# Altium PCB ECG_NEMO_final_V1B_main_stack1_fix.PcbDoc
Units mm, origin at the board's own origin, x right, y up, seen from the top; angles counter-clockwise.
Board outline 86.69 x 55.98 mm, 4 copper layers (Top Layer, Signal Layer 1 2.5V, Signal Layer 2, Bottom Layer), stack 0.778 mm thick; 47 components, 36 nets, 184 pads, 15 vias.
Unrouted connection lines stored in the file: 55.
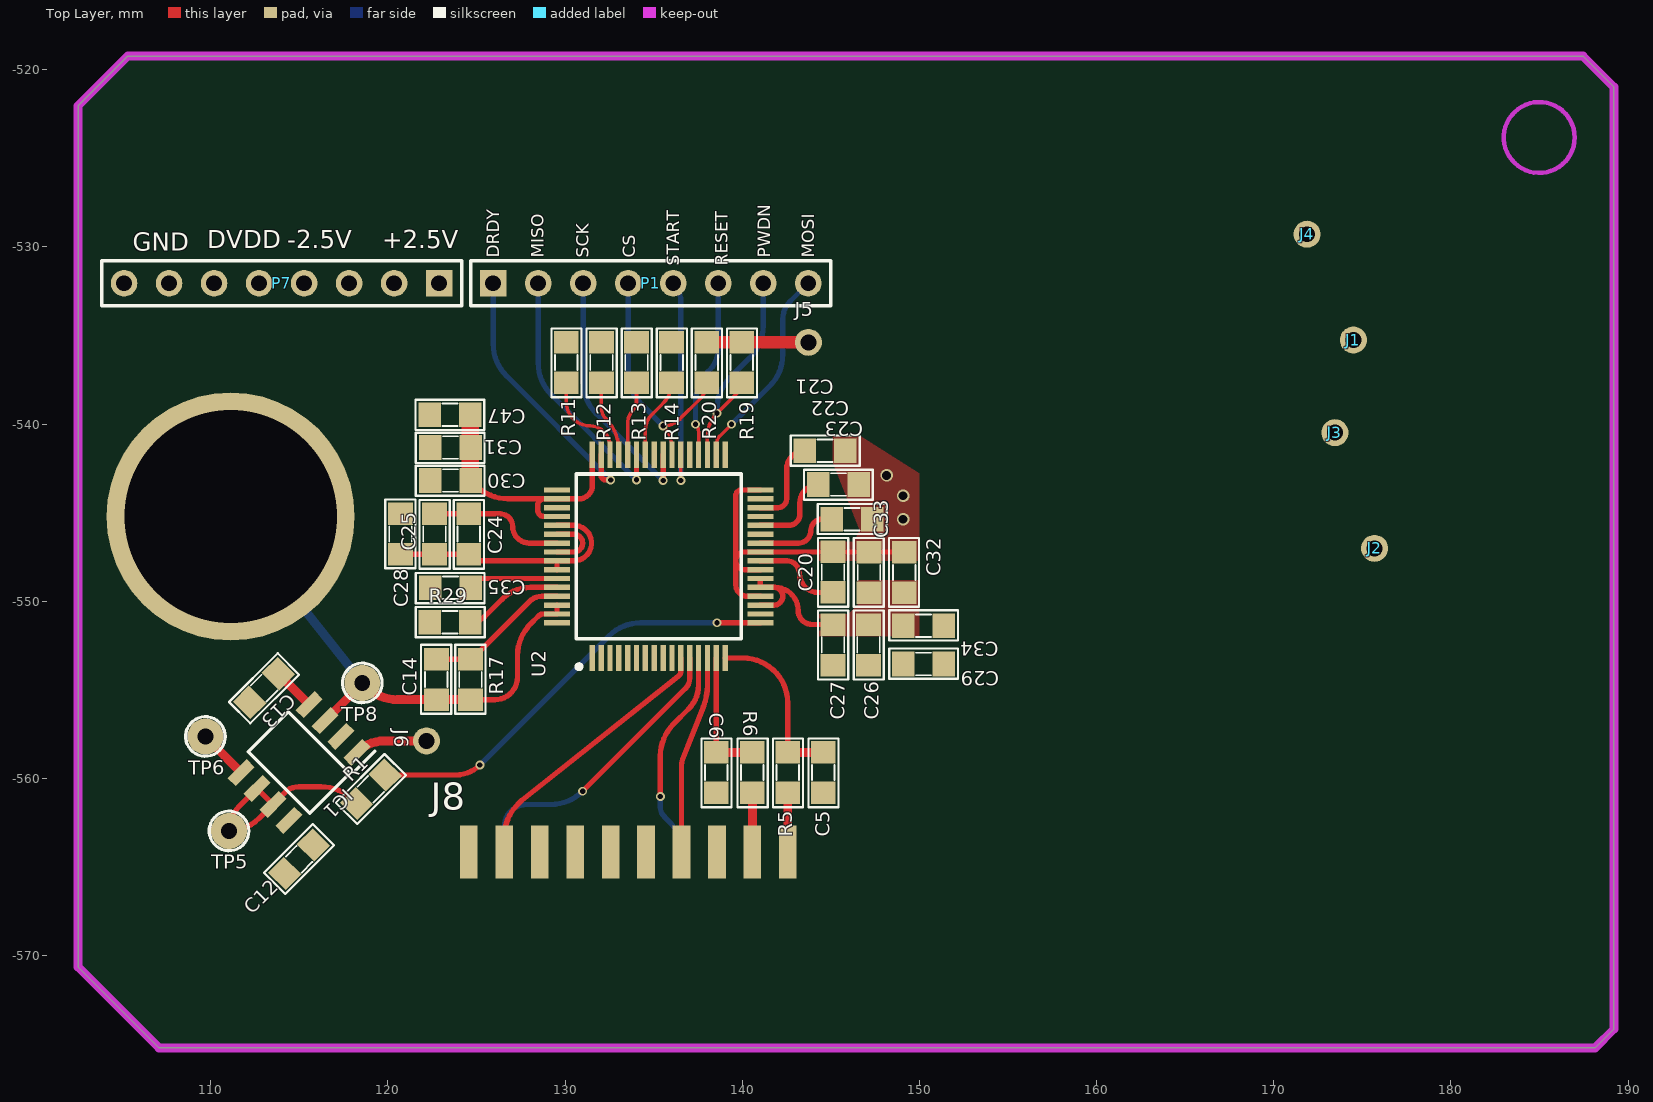
[diagram p0: Top Layer view]
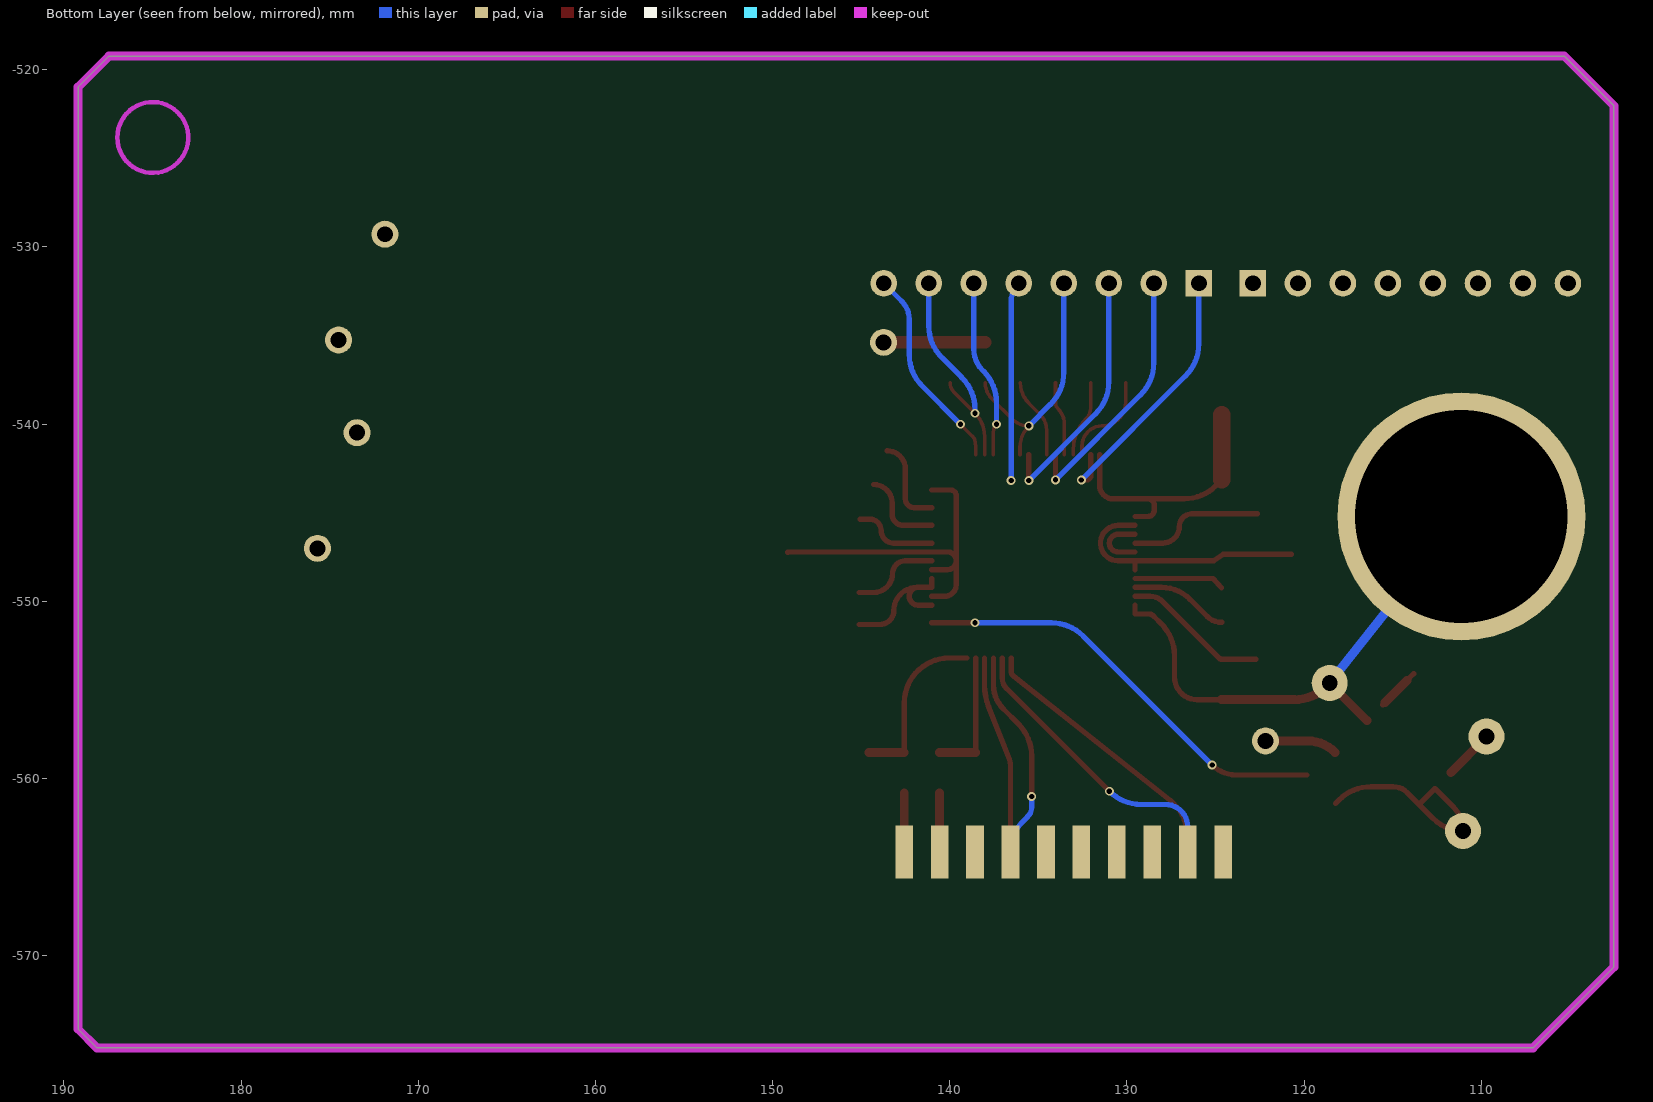
[diagram p1: Bottom Layer view, seen from below]
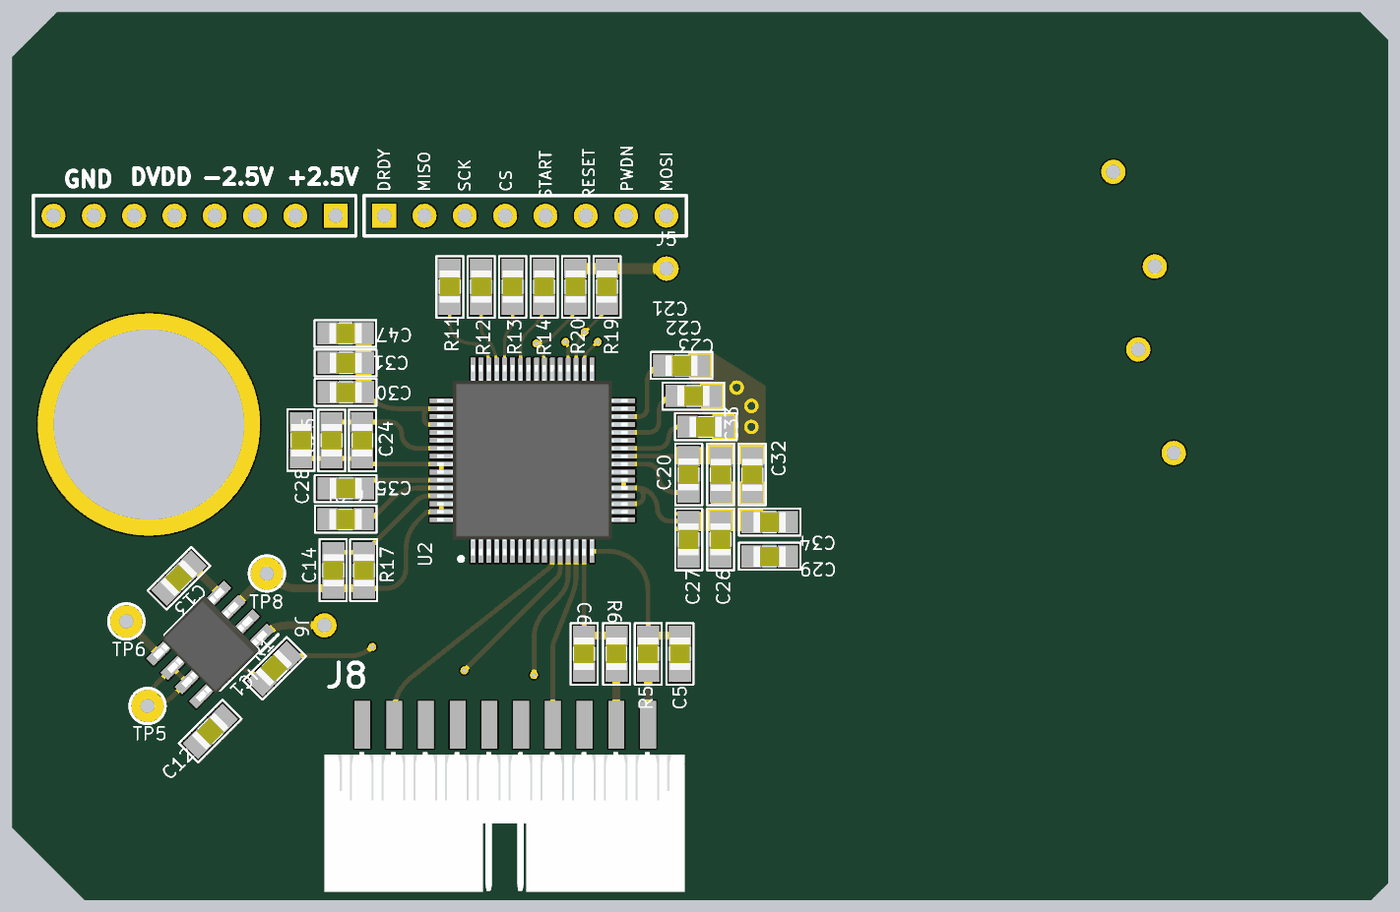
[diagram p2: 3D render of the assembled board from above, using the file's embedded part models]

## Layer stack, top to bottom
Top Solder: solder mask 0.0102, Solder Resist, Dk 3.5
Top Layer: signal copper 0.0356
Dielectric 1: core 0.254, FR-4, Dk 4.2
Signal Layer 1 2.5V: signal copper 0.036
Dielectric 3: prepreg 0.127, Dk 4.2
Signal Layer 2: signal copper 0.036
Dielectric 2: core 0.254, Dk 4.2
Bottom Layer: signal copper 0.0356
Solder Side: solder mask 0.0102, Solder Resist, Dk 3.5

## Board outline
102.514,-570.636 107.086,-575.208 188.138,-575.208 189.205,-574.142 189.205,-520.979 187.452,-519.227 105.32,-519.227 102.514,-522.033

## Design rules (kind name [scope] priority, off if disabled: settings)
Clearance Clearance_5mils [TouchesRoom('Driver') and OnTopLayer] p1: gap=0.127 ignorepadtopadclearanceinfootprint=TRUE
Clearance Clearance_5.7mils [TouchesRoom('FETs')] p2: gap=0.145 ignorepadtopadclearanceinfootprint=FALSE
Clearance Clearance_keepout [OnLayer('Keep-Out Layer')] p3: gap=0.711 ignorepadtopadclearanceinfootprint=FALSE
Clearance [All] p4: gap=0.2 ignorepadtopadclearanceinfootprint=FALSE
ComponentClearance [All] p1: gap=0.3 collisioncheckmode=3 verticalgap=0.3 showdistances=TRUE
HoleSize [All] p1: absolutevalues=TRUE maxlimit=10 minlimit=0.025 maxpercent=80.000 minpercent=20.000
HoleToHoleClearance [All] p1: gap=0.241 allowstackedmicrovias=TRUE
MinimumSolderMaskSliver [All] p1 off: minsoldermaskwidth=0.254
PlaneConnect [All] p1: planeconnectstyle=Direct reliefexpansion=0.508 reliefentries=4 reliefconductorwidth=0.254 reliefairgap=0.254
PolygonConnect [All] p1: connectstyle=Direct reliefconductorwidth=0.254 reliefentries=4 polygonreliefangle="90 Angle" airgapwidth=0.254
RoutingVias [All] p1: holewidth=0.3 width=0.5 viastyle="Through Hole" minholewidth=0.178 minwidth=0.351 maxholewidth=0.508 maxwidth=0.762
ShortCircuit [All] p1: allowed=TRUE
SilkToSilkClearance [All] p1 off: silktosilkclearance=0.254
SilkToSolderMaskClearance [IsPad] p1 off: minsilkscreentomaskgap=0.254 clearancetoexposedcopper=TRUE
SolderMaskExpansion [All] p1: expansion=0.102 istentingtop=FALSE
UnRoutedNet [All] p1: checkbadconnections=TRUE
UnpouredPolygon [All] p1 off:
Width [All] p1: maxlimit=3 minlimit=0.2 preferedwidth=0.3
20 further rules are at their usual default settings.

## Components (designator, comment, footprint, x,y, rotation, side; value= is the part's Value field where it differs from the comment)
C5 "4.7nF" SM-0805 144.574,-559.671 r90 top value=103
C6 "4.7nF" SM-0805 138.538,-559.671 r90 top value=103
C12 "0.1uF" SM-0805 114.987,-564.565 r225 top value=103
C13 "0.1uF" SM-0805 113.012,-554.897 r45 top value=103
C14 "1nF" SM-0805 122.74,-554.412 r270 top value=103
C20 "10uF" SM-0805 145.12,-548.36 r90 top value=103
C21 "1uF" SM-0805 144.676,-541.507 r180 top value=103
C22 "100uF" SM-0805 145.438,-543.412 r0 top value=103
C23 "1uF" SM-0805 146.2,-545.368 r180 top value=103
C24 "1uF" SM-0805 124.562,-546.21 r90 top value=103
C25 "0.1uF" SM-0805 122.631,-546.21 r90 top value=103
C26 "1uF" SM-0805 147.133,-552.456 r90 top value=103
C27 "0.1uF" SM-0805 145.12,-552.456 r90 top value=103
C28 "1uF" SM-0805 120.719,-546.21 r270 top value=103
C29 "0.1uF" SM-0805 150.225,-553.536 r180 top value=103
C30 "1uF" SM-0805 123.527,-543.183 r0 top value=103
C31 "0.1uF" SM-0805 123.527,-541.326 r0 top value=103
C32 "1uF" SM-0805 149.145,-548.385 r270 top value=103
C33 "0.1uF" SM-0805 147.158,-548.385 r270 top value=103
C34 "1uF" SM-0805 150.225,-551.377 r180 top value=103
C35 "0.1uF" SM-0805 123.527,-549.243 r0 top value=103
C47 "10uF" SM-0805 123.513,-539.467 r0 top value=103
IC1 "OPA2376AIDRG4" SOIC127P600X175-8N 114.987,-559.099 r225 top
J1 "Jump 1" PCBComponent_1 174.498,-535.254 r0 top
J2 "Jump 1" PCBComponent_1 175.692,-547.014 r0 top
J3 "Jump 1" PCBComponent_1 173.457,-540.487 r0 top
J4 "Jump 1" PCBComponent_1 171.882,-529.285 r0 top
J5 "Jump 1" PCBComponent_1 143.736,-535.386 r90 top
J6 "Jump 1" PCBComponent_1 122.182,-557.882 r270 top
J8 "DF11-20DP-2DSA_01_" "20P 2.5MM" 142.574,-564.146 r180 top
P1 "BOT Header 1" HDR1X8 125.948,-532.052 r0 top
P7 "TOP Header 3" HDR1X8 122.892,-532.052 r180 top
R1 "0" SM-0805 119.043,-560.611 r225 top value="R1/4W - 1K"
R5 "4.99k" SM-0805 142.574,-559.671 r90 top value="R1/4W - 1K"
R6 "4.99k" SM-0805 140.574,-559.671 r90 top value="R1/4W - 1K"
R11 "10k" SM-0805 130.073,-536.529 r90 top value="R1/4W - 1K"
R12 "10k" SM-0805 132.055,-536.529 r90 top value="R1/4W - 1K"
R13 "10k" SM-0805 134.036,-536.529 r90 top value="R1/4W - 1K"
R14 "10k" SM-0805 136.017,-536.529 r90 top value="R1/4W - 1K"
R17 "499k, 01%" SM-0805 124.67,-554.412 r270 top value="R1/4W - 1K"
R19 "10k" SM-0805 139.979,-536.529 r90 top value="R1/4W - 1K"
R20 "10k" SM-0805 137.998,-536.529 r90 top value="R1/4W - 1K"
R29 "1k" SM-0805 123.513,-551.192 r180 top value="R1/4W - 1K"
TP5 "TP" TP1 111.036,-562.962 r180 top value="Test Point"
TP6 "TP" TP1 109.704,-557.631 r180 top value="Test Point"
TP8 "TP" TP1 118.558,-554.61 r180 top value="Test Point"
U2 "Part Number: ADS1299IPAGR" QFP50P1200X1200X120-64N 135.288,-547.467 r90 top value=Value

## Footprints (in the part's own frame and the unit in brackets; to place one, negate y for a bottom-side part, rotate by r counter-clockwise, add the part's x,y. Pads: shape width x height; smd on the part's side, far side on the other; paste and mask are expansions set on the pad)
"20P 2.5MM" [mm]
  rect 1x3 smd: 1(0,0) 3(2,0) 5(4,0) 7(6,0) 9(8,0) 11(10,0) 13(12,0) 15(14,0) 17(16,0) 19(18,0)
  rect 1x3 smd far side: 2(0,0) 4(2,0) 6(4,0) 8(6,0) 10(8,0) 12(10,0) 14(12,0) 16(14,0) 18(16,0) 20(18,0)
  body extent -2.31,1.73 20.39,10.53, height 3.51
HDR1X8 [mm] "Connector; Header; 8 Position"
  rect 1.5x1.5 hole 0.9: 1(0,0)
  round 1.5 hole 0.9: 2(2.54,0) 3(5.08,0) 4(7.62,0) 5(10.16,0) 6(12.7,0) 7(15.24,0) 8(17.78,0)
  silkscreen extent -1.27,-1.27 19.05,1.27
PCBComponent_1 [mil]
  round 60 hole 35.43: 1(0,0)
QFP50P1200X1200X120-64N [mm]
  rect 1.475x0.3 smd: 1(-5.738,3.75) 2(-5.738,3.25) 3(-5.738,2.75) 4(-5.738,2.25) 5(-5.738,1.75) 6(-5.738,1.25) 7(-5.738,0.75) 8(-5.738,0.25) 9(-5.738,-0.25) 10(-5.738,-0.75) 11(-5.738,-1.25) 12(-5.738,-1.75) 13(-5.738,-2.25) 14(-5.738,-2.75) 15(-5.738,-3.25) 16(-5.738,-3.75) 33(5.738,-3.75) 34(5.738,-3.25) 35(5.738,-2.75) 36(5.738,-2.25) 37(5.738,-1.75) 38(5.738,-1.25) 39(5.738,-0.75) 40(5.738,-0.25) 41(5.738,0.25) 42(5.738,0.75) 43(5.738,1.25) 44(5.738,1.75) 45(5.738,2.25) 46(5.738,2.75) 47(5.738,3.25) 48(5.738,3.75)
  rect 0.3x1.475 smd: 17(-3.75,-5.738) 18(-3.25,-5.738) 19(-2.75,-5.738) 20(-2.25,-5.738) 21(-1.75,-5.738) 22(-1.25,-5.738) 23(-0.75,-5.738) 24(-0.25,-5.738) 25(0.25,-5.738) 26(0.75,-5.738) 27(1.25,-5.738) 28(1.75,-5.738) 29(2.25,-5.738) 30(2.75,-5.738) 31(3.25,-5.738) 32(3.75,-5.738) 49(3.75,5.738) 50(3.25,5.738) 51(2.75,5.738) 52(2.25,5.738) 53(1.75,5.738) 54(1.25,5.738) 55(0.75,5.738) 56(0.25,5.738) 57(-0.25,5.738) 58(-0.75,5.738) 59(-1.25,5.738) 60(-1.75,5.738) 61(-2.25,5.738) 62(-2.75,5.738) 63(-3.25,5.738) 64(-3.75,5.738)
  silkscreen extent -6.35,-4.65 4.65,4.65, body extent -6,-6 6,6, height 1.2
SM-0805 [mil]
  rect 50x55 smd: 1(-45,0) 2(45,0)
  silkscreen extent -77,-34 76,33, body extent -40,-25 40,25, height 24
SOIC127P600X175-8N [mm]
  rect 1.528x0.65 smd: 1(-2.711,1.905) 2(-2.711,0.635) 3(-2.711,-0.635) 4(-2.711,-1.905) 5(2.711,-1.905) 6(2.711,-0.635) 7(2.711,0.635) 8(2.711,1.905)
  silkscreen extent -3.47,-2.45 1.6,2.58, body extent -3.01,-2.45 3.01,2.45, height 1.63
TP1 [mil]
  round 80 hole 35: 1(0,0)
  silkscreen extent -44,-44 44,44

## Part data
C5 C6 C12 C13 C14 C20 C21 C22 C23 C24 C25 C26 C27 C28 C29 C30 C31 C32 C33 C34 C35 C47: library part CM, "Cap SMD"
IC1: "Integrated Circuit", Manufacturer_Name="Texas Instruments", Mouser Part Number=595-OPA2376AIDRG4, Arrow Part Number=OPA2376AIDRG4, Arrow Price/Stock=https://www.arrow.com/en/products/opa2376aidrg4/texas-instruments, Datasheet Link=https://datasheet.datasheetarchive.com/originals/distributors/SFDatasheet-6/sf-000133686.pdf, Height=1.75mm, Manufacturer_Part_Number=OPA2376AIDRG4, Mouser Price/Stock=https://www.mouser.co.uk/ProductDetail/Texas-Instruments/OPA2376AIDRG4?qs=IUbkBnfnSQIcJ9njy8NzUg%3D%3D
J1 J2 J3 J4 J5 J6: library part jump1
J8: "Connector", Manufacturer_Name=Hirose, Manufacturer_Part_Number=DF11-20DP-2DSA(01), Mouser Part Number=798-DF11-20DP-2DSA01, Datasheet Link=https://www.hirose.com/en/product/document?clcode=CL0543-0525-3-01&productname=DF11-20DP-2DSA(01)&series=DF11&documenttype=2DDrawing&lang=en&documentid=0000995343, Height=7.1mm, Mouser Price/Stock=https://www.mouser.co.uk/ProductDetail/Hirose-Connector/DF11-20DP-2DSA01?qs=Ux3WWAnHpjAvHkbqZ9K7Yg%3D%3D
P1 P7: library part "Header 8", "Header, 8-Pin", LatestRevisionDate=17-Jul-2002, LatestRevisionNote="Re-released for DXP Platform.", Publisher="Altium Limited"
R1 R5 R6 R11 R12 R13 R14 R17 R19 R20 R29: library part R, "Resistor 1/4W"
TP5 TP6 TP8: library part TP1, "Test Point"
U2: library part ADS1299IPAGR, "No Description Available", Built_By=EMA_UL_Team, Copyright="Copyright (C) 2018 Accelerated Designs. All rights reserved", Manufacturer_Part_Number=ADS1299IPAGR, RefDes=RefDes, Type=DEV, Vendor="Texas Instruments"

## Free pads (board coordinates)
  round 14 hole 12: 1(111.125,-545.217)

## Via types
v1: diameter 0.5, hole 0.3, Top Layer to Bottom Layer, 12 vias
v2: diameter 0.7, hole 0.5, Top Layer to Signal Layer 1 2.5V, 3 vias

## Nets (pads, with @x,y where several pads share a name; then routed paths per layer and width w, separated by ;. In a path a pad name is that pad's centre, name@x,y a point inside that pad or via, vN(x,y) a via of type N, cw(c..) or ccw(c..) an arc to the next point about the centre after c; other vN are vias at no path point)
+2.5V: C12.1 C26.2 C27.2 C32.2 C33.2 C34.2 C35.2 IC1.8 J1.1 J2.1 J8.5 J8.6 J8.19 J8.20 P7.1 P7.2 U2.19 U2.21 U2.22 U2.54 U2.56 U2.59 | length 16.7
  Top Layer w0.3: C35.2 125.155,-548.717 U2.59 ; U2.56 130.495,-547.217 ccw(c130.495,-546.717) 130.995,-546.717 ccw(c130.495,-546.717) 130.495,-546.217 U2.54 ; U2.19 141.791,-550.217 ccw(c141.791,-549.717) 142.291,-549.717 ccw(c141.791,-549.717) 141.791,-549.217 ; U2.22 U2.21 141.791,-549.217 ; C27.2 143.95,-551.313 cw(c143.95,-550.526) 143.162,-550.526 ccw(c141.854,-550.526) 141.854,-549.217 141.791,-549.217
-2.5V: C13.2 C20.2 C21.1 C22.2 C23.1 C24.1 C25.1 C26.1 C27.1 C28.2 C29.2 C32.1 C33.1 IC1.4 J3.1 J4.1 J8.11 J8.12 J8.13 J8.14 P7.3 P7.4 U2.20 U2.23 U2.25 U2.32 U2.53 U2.57 U2.58 | length 36.8
  Top Layer w0.3: C13.2 C13.2@114.204,-554.481 ; IC1.4@115.434,-555.711 IC1.4 ; C28.2 C25.1 C24.1 125.11,-547.717 U2.57 ; U2.58 U2.57 ; U2.53 130.137,-545.717 130.495,-545.717 cw(c130.495,-546.717) 130.495,-547.717 U2.57 ; U2.20 140.288,-549.717 cw(c140.288,-549.067) 139.638,-549.067 139.638,-547.717 ; U2.23 140.138,-548.217 cw(c140.138,-547.717) 139.638,-547.717 ; U2.32 139.968,-543.717 ccw(c139.968,-544.047) 139.638,-544.047 139.638,-547.717 ; C32.1 ccw(c149.12,-547.242) 149.12,-547.217 C20.2 U2.25 140.138,-547.217 ccw(c140.138,-547.717) 139.638,-547.717
  Top Layer w0.5: C13.2@114.204,-554.481 IC1.4@115.434,-555.711
  other v2: 149.082,-545.368 149.082,-544.047 148.155,-542.892
BIAS: C14.2 IC1.3 pad.1 R17.2 TP8.1 U2.62 U2.63 | length 30.1
  Top Layer w0.3: R17.2 126.04,-555.555 ccw(c126.04,-554.277) 127.318,-554.277 127.318,-553.069 cw(c129.858,-553.069) 128.062,-551.273 128.488,-550.847 cw(c128.802,-551.161) 128.802,-550.717 U2.63 U2.62
  Top Layer w0.5: IC1.3 118.544,-554.645 ccw(c118.51,-554.61) TP8.1 118.759,-554.811 ccw(c120.555,-553.015) 120.555,-555.555 C14.2 R17.2
  Bottom Layer w0.5: pad.1 TP8.1
CS: P1.4 R20.1 U2.39 | length 14.2
  Top Layer w0.2: U2.39 136.038,-541.309 ccw(c134.331,-541.309) v1(135.538,-540.102) ccw(c135.538,-538.75) 136.494,-539.706 137.623,-538.577 ccw(c136.719,-537.672) R20.1
  Bottom Layer w0.3: P1.4 133.568,-537.08 ccw(c136.108,-537.08) 134.312,-538.876 v1(135.538,-540.102)
DRDY: P1.1 U2.47 | length 15.6
  Top Layer w0.3: U2.47 132.038,-542.892 ccw(c132.294,-542.892) 132.294,-543.148 132.574,-543.148 v1(132.574,-543.154)
  Bottom Layer w0.3: P1.1 125.948,-535.475 ccw(c128.488,-535.475) 126.692,-537.271 v1(132.574,-543.154)
DVDD: C30.2 C31.2 C47.2 J5.1 P7.5 P7.6 R19.2 R20.2 U2.48 U2.50 U2.52 | length 20.9
  Top Layer w0.3: C30.2@124.656,-543.148 124.981,-543.473 ccw(c126.777,-541.677) 126.777,-544.217 U2.50 130.794,-544.217 ccw(c130.794,-543.473) 131.538,-543.473 U2.48 ; 128.812,-544.217 ccw(c128.812,-544.567) 128.462,-544.567 128.462,-544.867 ccw(c128.812,-544.867) 128.799,-545.217 128.801,-545.217 ccw(c128.811,-544.917) 128.812,-545.217 128.964,-545.217 U2.52
  Top Layer w0.7: R20.2 R19.2 J5.1
  Top Layer w1: C30.2@124.656,-543.148 C47.2
Elec_1: J8.17 U2.11 | length 15.6
  Top Layer w0.3: J8.17 126.574,-563.277 cw(c129.114,-563.277) 127.318,-561.481 127.582,-561.217 136.388,-554.229 ccw(c136.188,-553.942) 136.538,-553.942 U2.11
Elec_2: J8.7 U2.14 | length 11.2
  Top Layer w0.3: J8.7 136.574,-559.24 cw(c137.425,-559.24) 136.633,-558.929 ; 136.633,-558.928 137.806,-555.958 ccw(c134.705,-554.736) 138.038,-554.736 U2.14
Elec_3: C5.2 R5.2 U2.16 | length 9.8
  Top Layer w0.3: U2.16 140.034,-553.205 cw(c140.034,-555.745) 142.574,-555.745 R5.2
  Top Layer w0.5: R5.2 C5.2
Elec_4: C6.2 R6.2 U2.15 | length 7.4
  Top Layer w0.3: C6.2 U2.15
  Top Layer w0.5: C6.2 R6.2
Elec_5: J8.18 U2.12 | length 16.7
  Top Layer w0.3: v1(130.995,-560.723) 136.812,-554.906 ccw(c136.268,-554.362) 137.038,-554.362 U2.12
  Bottom Layer w0.3: J8.18 126.574,-562.731 cw(c127.838,-562.731) 127.838,-561.467 129.199,-561.467 ccw(c129.199,-558.927) v1(130.995,-560.723)
Elec_6: J8.8 U2.13 | length 12
  Top Layer w0.3: v1(135.382,-561.017) 135.382,-558.722 cw(c137.922,-558.722) 136.126,-556.926 136.986,-556.066 ccw(c135.653,-554.733) 137.538,-554.734 137.538,-553.792 U2.13
  Bottom Layer w0.3: v1(135.382,-561.017) 135.382,-561.628 ccw(c136.111,-561.628) 135.595,-562.143 135.85,-562.398 cw(c134.101,-564.146) J8.8
GND: C5.1 C6.1 C12.2 C13.1 C28.1 C29.1 C30.1 C31.1 C34.1 C35.1 C47.1 J8.9 J8.10 J8.15 J8.16 P7.7 P7.8 R11.2 R12.2 R13.2 R14.2 R29.2 U2.31 U2.33 U2.41 U2.49 U2.51
MISO: P1.2 U2.43 | length 14.7
  Top Layer w0.3: v1(134.038,-543.148) U2.43
  Bottom Layer w0.3: P1.2 128.488,-536.546 ccw(c131.028,-536.546) 129.232,-538.342 v1(134.038,-543.148)
MOSI: P1.8 U2.34 | length 11.6
  Top Layer w0.2: U2.34 138.538,-541.331 138.574,-541.007 138.575,-541 cw(c138.984,-541.015) 138.705,-540.715 138.706,-540.714 ccw(c138.566,-540.571) 138.734,-540.68 v1(139.401,-540.012)
  Bottom Layer w0.3: v1(139.401,-540.012) 141.547,-537.867 ccw(c139.751,-536.071) 142.291,-536.071 142.291,-534.086 cw(c143.731,-534.086) 142.713,-533.067 P1.8
NetC14_1: C14.1 R17.1 U2.61 | length 8.2
  Top Layer w0.3: C14.1 R17.1 ccw(c124.67,-553.119) 124.776,-553.225 127.986,-550.015 ; 127.986,-550.015 cw(c128.706,-550.735) 128.706,-549.717 U2.61
NetC20_1: C20.1 U2.24 | length 5.1
  Top Layer w0.3: U2.24 142.511,-547.717 cw(c142.511,-548.437) 143.231,-548.437 ccw(c144.297,-548.437) 144.297,-549.503 C20.1
NetC21_2: C21.2 U2.30 | length 5.1
  Top Layer w0.3: U2.30 142.011,-544.717 ccw(c142.011,-544.217) 142.511,-544.217 142.511,-542.529 cw(c143.533,-542.529) C21.2
NetC22_1: C22.1 U2.28 | length 4.9
  Top Layer w0.3: U2.28 142.623,-545.717 ccw(c142.623,-545.086) 143.253,-545.086 143.253,-544.453 cw(c144.295,-544.453) C22.1
NetC23_2: C23.2 U2.26 | length 4.8
  Top Layer w0.3: U2.26 143.162,-546.717 ccw(c143.162,-546.003) 143.877,-546.003 cw(c144.512,-546.003) 144.512,-545.368 C23.2
NetC24_2: C24.2 C25.2 U2.55 | length 7.9
  Top Layer w0.3: C25.2 C24.2 126.336,-545.067 cw(c126.336,-545.778) 127.047,-545.778 ccw(c127.986,-545.778) 127.986,-546.717 U2.55
NetIC1_1: IC1.1 IC1.2 J6.1 | length 4.1
  Top Layer w0.5: IC1.1 cw(c119.814,-560.092) 119.814,-557.882 J6.1
NetIC1_6: IC1.6 IC1.7 R1.2 TP5.1 | length 12.6
  Top Layer w0.3: R1.2 118.027,-561.211 ccw(c116.231,-563.007) 116.231,-560.467 114.987,-560.467 ccw(c114.987,-561.602) 114.185,-560.8 IC1.7 ; IC1.7 IC1.6 111.608,-561.58 ccw(c112.99,-562.962) TP5.1 ccw(c111.036,-560.579) 112.721,-562.264 IC1.7
NetR1_1: R1.1 U2.17 | length 24.5
  Top Layer w0.3: R1.1 123.838,-559.803 ccw(c123.838,-557.882) v1(125.196,-559.24) ; v1(138.574,-551.217) U2.17
  Bottom Layer w0.3: v1(125.196,-559.24) 132.476,-551.961 cw(c134.272,-553.757) 134.272,-551.217 v1(138.574,-551.217)
NetR11_1: R11.1 U2.46 | length 5.5
  Top Layer w0.203: R11.1 130.073,-538.763 ccw(c131.413,-538.763) 131.413,-540.102 cw(c131.413,-541.227) 132.538,-541.227 U2.46
NetR12_1: R12.1 U2.45 | length 4.3
  Top Layer w0.203: R12.1 132.055,-539.107 ccw(c132.871,-539.107) 132.294,-539.684 cw(c130.498,-541.48) 132.959,-540.854 ccw(c133.156,-540.803) 132.967,-540.878 cw(c132.688,-540.991) 132.989,-540.975 ccw(c133.192,-540.963) 132.992,-541 cw(c130.498,-541.48) 133.008,-541.093 133.038,-541.48 U2.45
NetR13_1: R13.1 U2.44 | length 4.2
  Top Layer w0.203: U2.44 133.538,-540.012 cw(c134.818,-540.012) 133.913,-539.107 ccw(c133.616,-538.81) 134.036,-538.81 R13.1
NetR14_1: R14.1 U2.42 | length 4.5
  Top Layer w0.203: U2.42 134.538,-540.34 cw(c135.773,-540.34) 134.899,-539.467 135.538,-538.829 ccw(c134.381,-537.672) R14.1
NetR29_1: R29.1 U2.60 | length 5.6
  Top Layer w0.3: R29.1 ccw(c124.656,-550.015) 125.488,-550.847 126.456,-549.878 cw(c128.053,-551.474) 128.053,-549.217 U2.60
PWDN: P1.7 R19.1 U2.35 | length 12.9
  Top Layer w0.2: U2.35 138.038,-540.683 cw(c139.872,-540.683) v1(138.575,-539.386) 139.761,-538.2 ccw(c139.233,-537.672) R19.1
  Bottom Layer w0.3: v1(138.575,-539.386) 138.575,-539.174 cw(c141.115,-539.174) 139.319,-537.378 140.444,-536.253 ccw(c138.648,-534.457) 141.188,-534.457 P1.7
REF_IN: IC1.5 TP6.1 | length 2.9
  Top Layer w0.5: TP6.1 ccw(c109.75,-557.631) 109.718,-557.663 IC1.5
RESET: P1.6 U2.36 | length 10.1
  Top Layer w0.2: v1(137.363,-540.012) cw(c136.942,-540.434) 137.538,-540.434 U2.36
  Bottom Layer w0.3: v1(137.363,-540.012) 137.363,-538.802 cw(c139.903,-538.802) 138.107,-537.006 138.153,-536.961 ccw(c136.957,-535.766) 138.648,-535.766 P1.6
SCK: P1.3 U2.40 | length 14.3
  Top Layer w0.3: v1(135.538,-543.183) U2.40
  Bottom Layer w0.3: P1.3 131.028,-537.621 ccw(c133.568,-537.621) 131.772,-539.417 v1(135.538,-543.183)
Signal_3: J8.1 R5.1 | length 3.3
  Top Layer w0.5: J8.1 R5.1
Signal_4: J8.3 R6.1 | length 3.3
  Top Layer w0.5: J8.3 R6.1
START: P1.5 U2.38 | length 12.7
  Top Layer w0.2: v1(136.538,-543.183) U2.38
  Bottom Layer w0.3: P1.5 cw(c135.07,-533.09) 136.538,-533.09 v1(136.538,-543.183)
pads on no net: J8.2 J8.4 U2.1 U2.2 U2.3 U2.4 U2.5 U2.6 U2.7 U2.8 U2.9 U2.10 U2.18 U2.27 U2.29 U2.37 U2.64

## Polygon pours and split planes (outlines as drawn)
+2.5V on Top Layer "+2.5V_L01_P011" (solid, pour order 11): 149.984,-551.961 144.282,-551.961 144.282,-550.742 145.984,-550.742 146.523,-550.202 146.523,-548.817 149.981,-548.817 149.984,-548.815
-2.5V on Top Layer "-2.5V_L01_P003" (solid, pour order 3): 146.619,-540.643 149.984,-542.777 149.984,-547.717 144.282,-547.717 144.282,-546.642 146.295,-546.642 146.631,-546.003 145.107,-542.142 145.107,-540.643

## Keep-outs
Keep-Out Layer:
  circle w0.254: c184.988,-523.824 r2
  lines w0.5: 102.514,-570.636 102.514,-522.033 105.32,-519.227 114.173,-519.227 159.69,-519.227 187.452,-519.227 189.205,-520.979 189.205,-574.142 188.138,-575.208 159.233,-575.208 107.086,-575.208 102.514,-570.636

## Silkscreen, mask and mechanical layers (free items; w line width, h text height)
Top Overlay:
  text "DVDD" at 109.804,-530.073 h1
  text "-2.5V" at 114.323,-530.073 h1
  text "+2.5V" at 119.676,-530.073 h1
  text "GND" at 105.613,-530.225 h1
  text "DRDY" at 126.278,-530.602 h0.7 r90
  text "MISO" at 128.803,-530.602 h0.7 r90
  text "SCK" at 131.353,-530.602 h0.7 r90
  text "CS" at 133.953,-530.602 h0.7 r90
  text "PWDN" at 141.578,-530.602 h0.7 r90
  text "MOSI" at 144.078,-530.602 h0.7 r90
  text "START" at 136.453,-531.052 h0.7 r90
  text "RESET" at 139.178,-531.052 h0.7 r90